# EAGLE board led8pins (EAGLE 6.3)
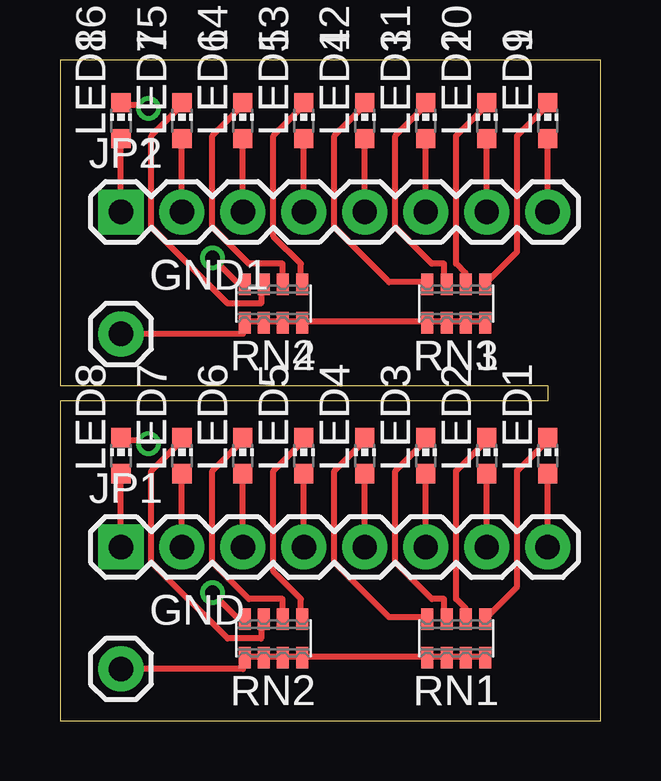
[diagram p0: board, top side]
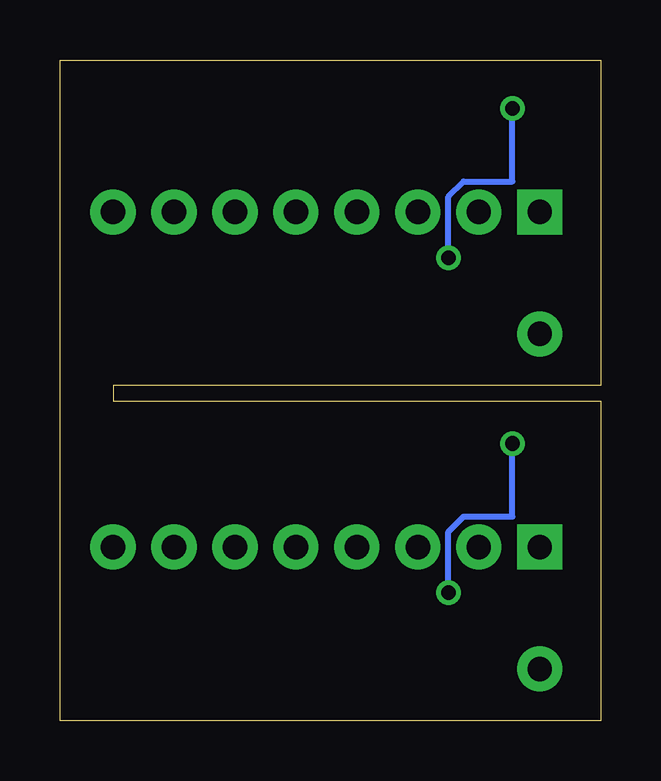
[diagram p1: board, bottom side, seen from below]

Size 22.53 x 27.55 mm. Coordinates in mm from the lower left corner, seen from the top.
Outline: 0,0 22.53,0 22.53,27.55 0,27.55 0,13.97 20.32,13.97 20.32,13.33 0,13.33 0,0
Copper layers (1*16): Top 0.035mm / dielectric 1.5mm / Bottom 0.035mm
Design rules "default": minimum track width 10mil, minimum drill 24mil, track to track 8mil, track to pad 8mil, pad to pad 8mil, via to via 8mil, smd to smd 8mil, copper to edge 40mil, drill to drill 8mil, minimum pad ring 10mil, minimum via ring 8mil, stop-mask expansion 4mil, vias tented up to drill 0mil, thermal gap 10mil

## Footprints (pad centres in the part's own frame; a part is rotated, then mirrored left to right if it is on the bottom)
1X01 = drill 1.016 pad 1.88: 1 0,0
1X08 = drill 1.016 pad 1.88 square: 1 0,0 | drill 1.016 pad 1.88: 2 2.54,0; 3 5.08,0; 4 7.62,0; 5 10.16,0; 6 12.7,0; 7 15.24,0; 8 17.78,0
CHIP-LED0603 = smd 0.8 x 0.8: A 0,-0.75; C 0,0.75
CTS742C083 = smd 0.5 x 0.9: 1 -1.2,-0.8; 2 -0.4,-0.8; 3 0.4,-0.8; 4 1.2,-0.8; 5 1.2,0.8; 6 0.4,0.8; 7 -0.4,0.8; 8 -1.2,0.8

## Placement (x,y rotation side)
GND  M01PTH  [1X01]  2.54,2.16 0 top
GND1  M01PTH  [1X01]  2.54,16.13 0 top
JP1  [1X08]  2.54,7.24 0 top
JP2  [1X08]  2.54,21.21 0 top
LED1  [CHIP-LED0603]  20.32,11.05 0 top
LED2  [CHIP-LED0603]  17.78,11.05 0 top
LED3  [CHIP-LED0603]  15.24,11.05 0 top
LED4  [CHIP-LED0603]  12.7,11.05 0 top
LED5  [CHIP-LED0603]  10.16,11.05 0 top
LED6  [CHIP-LED0603]  7.62,11.05 0 top
LED7  [CHIP-LED0603]  5.08,11.05 0 top
LED8  [CHIP-LED0603]  2.54,11.05 0 top
LED9  [CHIP-LED0603]  20.32,25.02 0 top
LED10  [CHIP-LED0603]  17.78,25.02 0 top
LED11  [CHIP-LED0603]  15.24,25.02 0 top
LED12  [CHIP-LED0603]  12.7,25.02 0 top
LED13  [CHIP-LED0603]  10.16,25.02 0 top
LED14  [CHIP-LED0603]  7.62,25.02 0 top
LED15  [CHIP-LED0603]  5.08,25.02 0 top
LED16  [CHIP-LED0603]  2.54,25.02 0 top
RN1  CTS742C083  [CTS742C083]  16.51,3.43 180 top
RN2  CTS742C083  [CTS742C083]  8.89,3.43 180 top
RN3  CTS742C083  [CTS742C083]  16.51,17.4 180 top
RN4  CTS742C083  [CTS742C083]  8.89,17.4 180 top

## Library data of the parts
GND GND1 JP1 JP2 = SparkFun-Connectors
LED1-LED16 = adafruit
RN1-RN4 = resistor-net; OC_FARNELL: unknown; OC_NEWARK: unknown

## Nets
N$1: JP1.8 LED1.A
N$2: JP1.7 LED2.A
N$3: JP1.6 LED3.A
N$4: JP1.5 LED4.A
N$5: JP1.4 LED5.A
N$6: JP1.3 LED6.A
N$7: JP1.2 LED7.A
N$8: JP1.1 LED8.A
N$9: LED1.C RN1.1
N$10: LED2.C RN1.2
N$11: LED3.C RN1.3
N$12: LED4.C RN1.4
N$13: LED5.C RN2.1
N$14: LED6.C RN2.2
N$15: LED7.C RN2.3
N$16: LED8.C RN2.4
N$17: GND.1 RN1.5 RN1.6 RN1.7 RN1.8 RN2.5 RN2.6 RN2.7 RN2.8
N$18: JP2.8 LED9.A
N$19: JP2.7 LED10.A
N$20: JP2.6 LED11.A
N$21: JP2.5 LED12.A
N$22: JP2.4 LED13.A
N$23: JP2.3 LED14.A
N$24: JP2.2 LED15.A
N$25: JP2.1 LED16.A
N$26: LED9.C RN3.1
N$27: LED10.C RN3.2
N$28: LED11.C RN3.3
N$29: LED12.C RN3.4
N$30: LED13.C RN4.1
N$31: LED14.C RN4.2
N$32: LED15.C RN4.3
N$33: LED16.C RN4.4
N$34: GND1.1 RN3.5 RN3.6 RN3.7 RN3.8 RN4.5 RN4.6 RN4.7 RN4.8

## Tracks (layer width: path | path; a pad name or v marks a point on that pad's centre or on a via)
N$1
  Top 0.254: JP1.8 LED1.A
N$2
  Top 0.254: JP1.7 LED2.A
N$3
  Top 0.254: JP1.6 LED3.A
N$4
  Top 0.254: JP1.5 LED4.A
N$5
  Top 0.254: JP1.4 LED5.A
N$6
  Top 0.254: JP1.3 LED6.A
N$7
  Top 0.254: JP1.2 LED7.A
N$8
  Top 0.254: JP1.1 LED8.A
N$9
  Top 0.254: LED1.C 20.32,11.68 19.05,10.41 19.05,5.59 17.78,4.32 RN1.1
N$10
  Top 0.254: LED2.C 17.78,11.68 16.51,10.41 16.51,5.08 16.89,4.7 16.89,4.32 RN1.2
N$11
  Top 0.254: LED3.C 15.24,11.68 13.97,10.41 13.97,6.6 15.49,5.08 16,5.08 16,4.32 RN1.3
N$12
  Top 0.254: LED4.C 12.7,11.68 11.43,10.41 11.43,6.6 13.72,4.32 15.24,4.32 RN1.4
N$13
  Top 0.254: LED5.C 10.16,11.68 8.89,10.41 8.89,6.22 10.03,5.08 10.03,4.32 RN2.1
N$14
  Top 0.254: LED6.C 7.62,11.68 6.35,10.41 6.35,6.6 7.87,5.08 9.27,5.08 9.27,4.32 RN2.2
N$15
  Top 0.254: LED7.C 5.08,11.68 3.81,10.41 3.81,6.6 6.99,3.43 8.38,3.43 8.38,4.19 RN2.3
N$16  (via drill 0.61)
  Top 0.254: v3.68,11.56 3.68,11.68 2.54,11.68 LED8.C | v6.35,5.33 7.37,4.32 7.62,4.32 RN2.4
  Bottom 0.254: v3.68,11.56 3.68,8.51 5.71,8.51 6.35,7.87 v6.35,5.33
N$17
  Top 0.254: RN1.8 17.65,2.67 17.02,2.67 RN1.7 16.89,2.67 16.13,2.67 RN1.6 16,2.67 15.37,2.67 RN1.5 15.24,2.67 10.16,2.67 RN2.8 10.03,2.67 9.4,2.67 RN2.7 9.27,2.67 8.51,2.67 RN2.6 8.38,2.67 7.75,2.67 RN2.5 7.62,2.54 7.62,2.16 GND.1
N$18
  Top 0.254: JP2.8 LED9.A
N$19
  Top 0.254: JP2.7 LED10.A
N$20
  Top 0.254: JP2.6 LED11.A
N$21
  Top 0.254: JP2.5 LED12.A
N$22
  Top 0.254: JP2.4 LED13.A
N$23
  Top 0.254: JP2.3 LED14.A
N$24
  Top 0.254: JP2.2 LED15.A
N$25
  Top 0.254: JP2.1 LED16.A
N$26
  Top 0.254: LED9.C 20.32,25.65 19.05,24.38 19.05,19.56 17.78,18.29 RN3.1
N$27
  Top 0.254: LED10.C 17.78,25.65 16.51,24.38 16.51,19.05 16.89,18.67 16.89,18.29 RN3.2
N$28
  Top 0.254: LED11.C 15.24,25.65 13.97,24.38 13.97,20.57 15.49,19.05 16,19.05 16,18.29 RN3.3
N$29
  Top 0.254: LED12.C 12.7,25.65 11.43,24.38 11.43,20.57 13.72,18.29 15.24,18.29 RN3.4
N$30
  Top 0.254: LED13.C 10.16,25.65 8.89,24.38 8.89,20.19 10.03,19.05 10.03,18.29 RN4.1
N$31
  Top 0.254: LED14.C 7.62,25.65 6.35,24.38 6.35,20.57 7.87,19.05 9.27,19.05 9.27,18.29 RN4.2
N$32
  Top 0.254: LED15.C 5.08,25.65 3.81,24.38 3.81,20.57 6.99,17.4 8.38,17.4 8.38,18.16 RN4.3
N$33  (via drill 0.61)
  Top 0.254: v3.68,25.53 3.68,25.65 2.54,25.65 LED16.C | v6.35,19.3 7.37,18.29 7.62,18.29 RN4.4
  Bottom 0.254: v3.68,25.53 3.68,22.48 5.71,22.48 6.35,21.84 v6.35,19.3
N$34
  Top 0.254: RN3.8 17.65,16.64 17.02,16.64 RN3.7 16.89,16.64 16.13,16.64 RN3.6 16,16.64 15.37,16.64 RN3.5 15.24,16.64 10.16,16.64 RN4.8 10.03,16.64 9.4,16.64 RN4.7 9.27,16.64 8.51,16.64 RN4.6 8.38,16.64 7.75,16.64 RN4.5 7.62,16.51 7.62,16.13 GND1.1

## Text on the board
_tNames: LED8 | LED7 | LED6 | LED5 | LED4 | LED3 | LED2 | LED1 | JP1 | GND | RN2 | RN1 | LED8 | LED7 | LED6 | LED5 | LED4 | LED3 | LED2 | LED1 | JP1 | GND | RN2 | RN1